# Altium PCB 2017_CHECK UP LED.PcbDoc
Units mil, origin at the board's own origin, x right, y up, seen from the top; angles counter-clockwise.
Board outline 2716.54 x 511.81 mil, 4 copper layers (1-TOP, 2-SIGNAL, 3-GND, 4-BOT), stack 68 mil thick; 13 components, 14 nets, 34 pads, 12 vias.
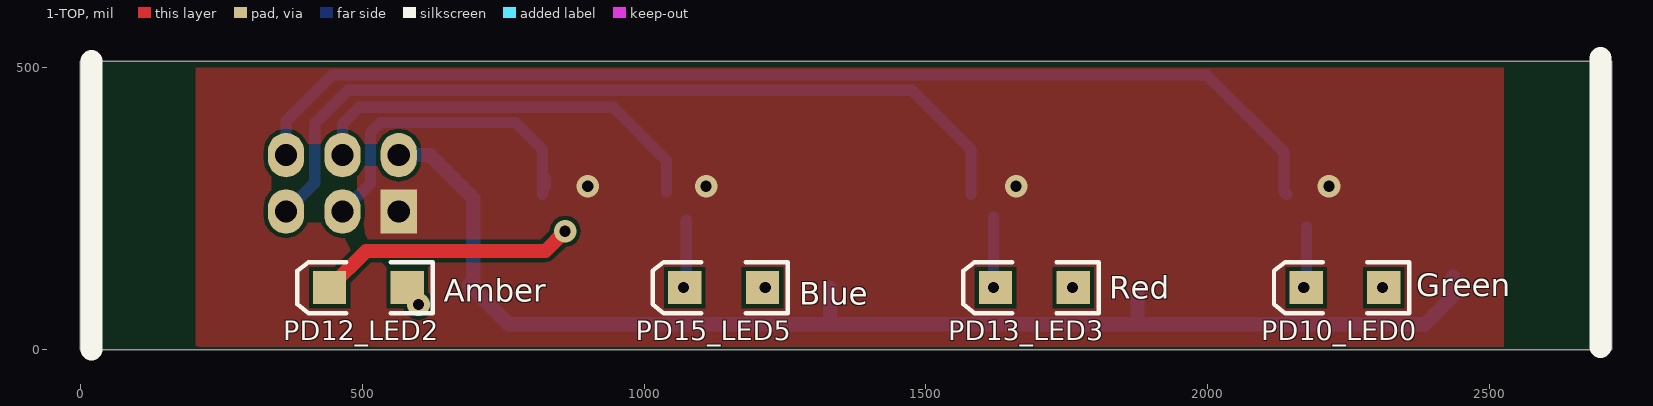
[diagram p0: 1-TOP view]
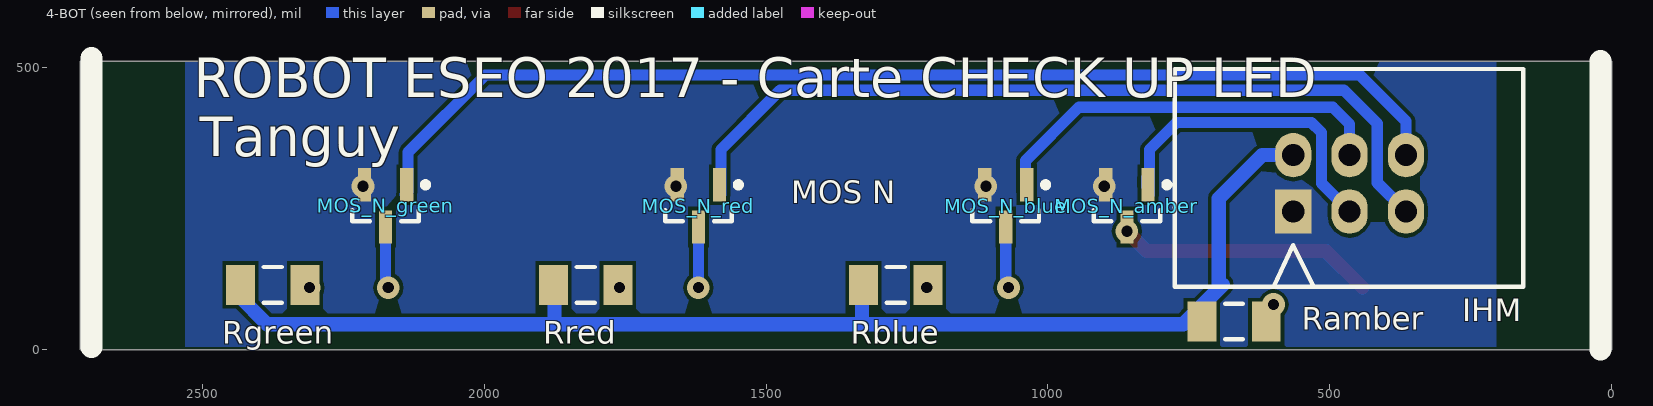
[diagram p1: 4-BOT view, seen from below]
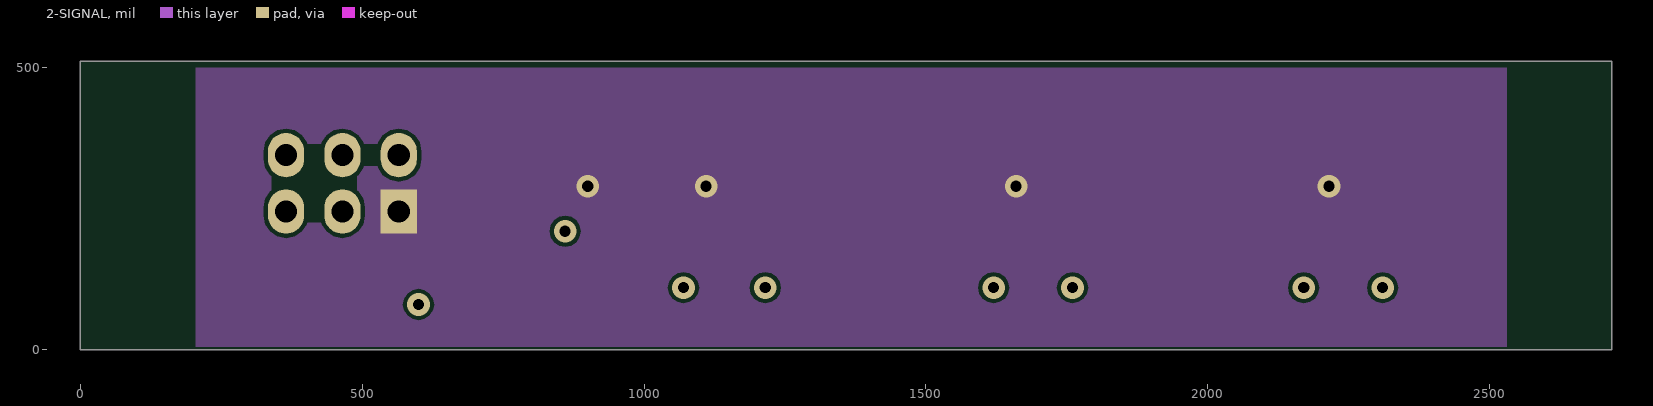
[diagram p2: 2-SIGNAL]
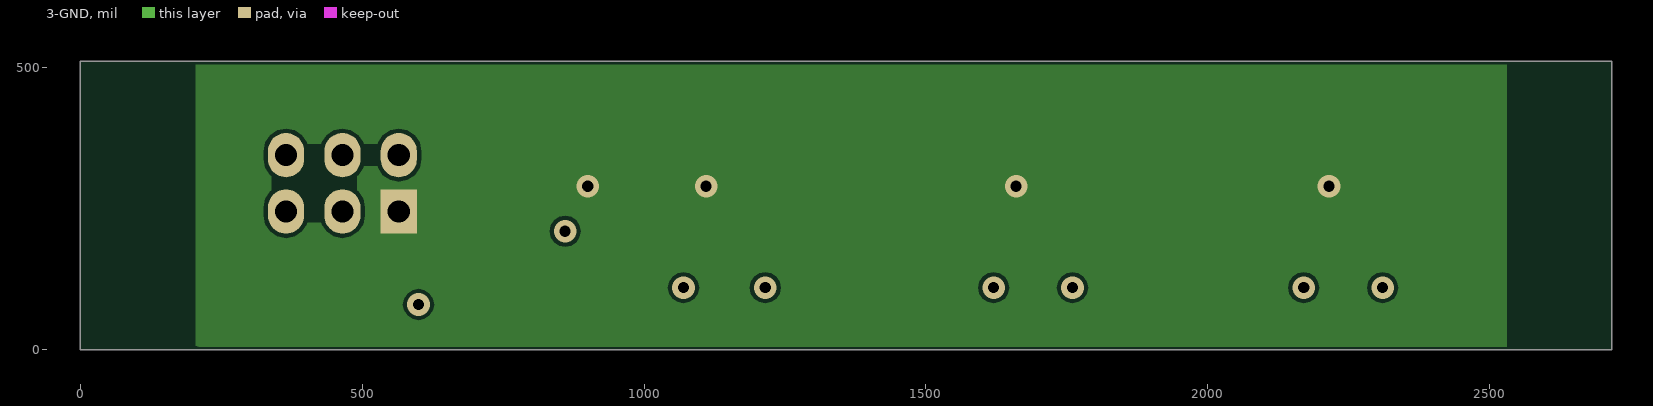
[diagram p3: 3-GND]
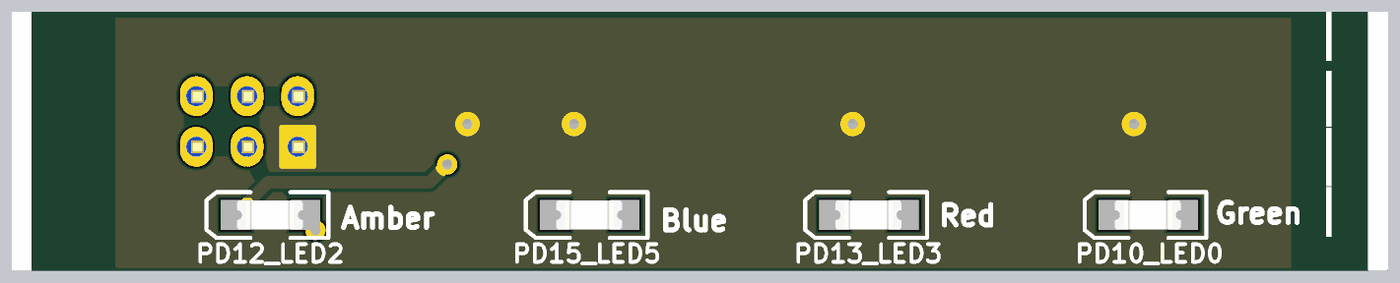
[diagram p4: 3D render of the assembled board from above, using the file's embedded part models]
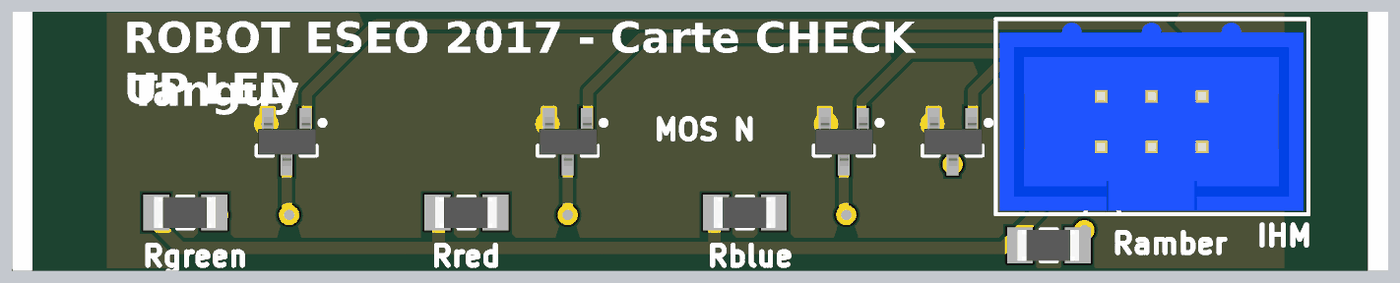
[diagram p5: 3D render of the assembled board from below, using the file's embedded part models]

## Layer stack, top to bottom
Top Solder: solder mask 0.4, Solder Resist, Dk 3.5
1-TOP: signal copper 1.4
Dielectric1: core 20.8, FR-4, Dk 4.8
2-SIGNAL: signal copper 1.4
Dielectric2: prepreg 20.8, FR-4, Dk 4.8
3-GND: signal copper 1.4
Dielectric3: core 20.8, FR-4, Dk 4.8
4-BOT: signal copper 1.4
Bottom Solder: solder mask 0.4, Solder Resist, Dk 3.5

## Board outline
0,0 0,511.81 2716.54,511.81 2716.54,0

## Design rules (kind name [scope] priority, off if disabled: settings)
Clearance Clearance_4 [InNamedPolygon('GND_TOP') Or  InNamedPolygon('3-GND') Or  InNamedPolygon('2-GND') Or  InNamedPolygon('4-GND')] p1: gap=15
Clearance Clearance_3 [InNamedPolygon('4-GND') Or  InNamedPolygon('GND_TOP') Or  InNamedPolygon('2-GND') Or  InNamedPolygon('3-GND')] p2: gap=10
Clearance Clearance_2 [InNamedPolygon('4-GND') Or  InNamedPolygon('2-GND') Or  InNamedPolygon('3-GND') Or  InNamedPolygon('1-GND') Or  InNamedPolygon('2-GND24')] p3: gap=10
Clearance Clearance_1 [InNamedPolygon('2-GND') Or  InNamedPolygon('3-GND') Or  InNamedPolygon('1-GND') Or  InNamedPolygon('4-GND')] p4: gap=10
Clearance [All] p5: gap=7
FabricationTestpoint [(IsPad And (OnTopLayer Or OnBottomLayer))] p1: side=3 testpointundercomponent=TRUE minsize=40 maxsize=100 preferedsize=60 minholesize=0 maxholesize=40 preferedholesize=32 testpointgrid=1 allowsidetop=TRUE allowsidebottom=TRUE usegrid=TRUE gridtolerance=0.01
HoleSize [All] p1: absolutevalues=TRUE maxlimit=200 minlimit=1 maxpercent=80.000 minpercent=20.000
PlaneConnect [All] p1: planeconnectstyle=Direct reliefexpansion=20 reliefentries=4 reliefconductorwidth=10 reliefairgap=10
PolygonConnect [All] p1: connectstyle=Direct reliefconductorwidth=10 reliefentries=4 polygonreliefangle="90 Angle" airgapwidth=10
RoomDefinition "2017_CHECK UP LED" [InComponentClass('2017_CHECK UP LED')] p1: confinementstyle=ConfineIn formatcopy=TRUE lockcomponents=FALSE outline 3013.39,300.67 2343.31,300.67 2343.31,976.81 3013.39,976.81
RoutingVias [All] p1: holewidth=7.87 width=7.87 viastyle="Through Hole" minholewidth=7.87 minwidth=7.87 maxholewidth=7.87 maxwidth=7.87
SilkToSolderMaskClearance SilkscreenOverComponentPads [IsPad] p1: minsilkscreentomaskgap=10 clearancetoexposedcopper=TRUE
SolderMaskExpansion [All] p1: expansion=4
Width [All] p1: maxlimit=200 minlimit=7 preferedwidth=16
25 further rules are at their usual default settings.

## Components (designator, comment, footprint, x,y, rotation, side; value= is the part's Value field where it differs from the comment)
Amber "LED" LED_1206 511.18,110 r180 top
Blue "LED" LED_1206 1141.1,110 r180 top
Green "LED" LED_1206 2243.46,110 r180 top
IHM "HE10/6_MALE_DROIT_BAS PROFIL" HE10/6_M_D_BP 565,345 r180 bottom
MOS_N_amber "Transistor MOSFET-N" SOT23-3N 860,255 r270 bottom
MOS_N_blue "Transistor MOSFET-N" SOT23-3N 1075,255 r270 bottom
MOS_N_green "Transistor MOSFET-N" SOT23-3N 2175,255 r270 bottom
MOS_N_red "Transistor MOSFET-N" SOT23-3N 1620,255 r270 bottom
Ramber "150" R1206_N 670,50 r0 bottom
Rblue "100" R1206_N 1270,115 r0 bottom
Red "LED" LED_1206 1692.28,110 r180 top
Rgreen "100" R1206_N 2375,115 r0 bottom
Rred "150" R1206_N 1820,115 r0 bottom

## Footprints (in the part's own frame and the unit in brackets; to place one, negate y for a bottom-side part, rotate by r counter-clockwise, add the part's x,y. Pads: shape width x height; smd on the part's side, far side on the other; paste and mask are expansions set on the pad)
HE10/6_M_D_BP [mm] "HE10 ; 6 CONTACTS ; MALE ;  DROIT; BAS PROFIL ; ESPACEMENTS BROCHES = 2.54 mm"
  rect 1.63x2 hole 1: 1(0,-2.54)
  oval 1.63x2 hole 1: 2(0,0) 3(2.54,-2.54) 4(2.54,0) 5(5.08,-2.54) 6(5.08,0)
  silkscreen extent -5.33,-5.94 10.36,3.88, body extent -5.13,-5.75 10.11,3.7, height 9.1
LED_1206 [mm] "SM LED; 2 Flat Leads"
  rect 1.5x1.5 smd: 1(-1.75,0) 2(1.75,0)
  silkscreen extent -2.9,-1.15 3.2,1.15, body extent -1.62,-0.72 1.68,0.73, height 1.36
R1206_N [mm] "Chip Resistor, Body 3.2x1.6mm, IPC Medium Density"
  rect 1.3x1.8 smd: 1(-1.45,0) 2(1.45,0)
  silkscreen extent -0.4,-0.8 0.4,0.8, body extent -1.68,-0.87 1.68,0.87, height 0.71
SOT23-3N [mm] "SOT23, 3-Leads, Body 2.9x1.3mm, Pitch 0.95mm, Lead Span 2.5mm, IPC Medium Density"
  rect 1.5x0.6 smd: 1(-0.95,0.95) 2(-0.95,-0.95) 3(0.95,0)
  silkscreen extent -1.07,-1.5 0.7,1.92, body extent -1.24,-1.5 1.23,1.5, height 1.1

## Part data
Amber Blue Green Red: "Typical LED"
IHM: "EMBASE HE10/6 MALE DROIT BAS PROFIL"
MOS_N_amber MOS_N_blue MOS_N_green MOS_N_red: "N-Channel MOSFET"
Ramber Rblue Rgreen Rred: library part Resistor, "Resistor"

## Via types
v1: diameter 40, hole 20, 1-TOP to 4-BOT, 12 vias

## Nets (pads, with @x,y where several pads share a name; then routed paths per layer and width w, separated by ;. In a path a pad name is that pad's centre, name@x,y a point inside that pad or via, vN(x,y) a via of type N, cw(c..) or ccw(c..) an arc to the next point about the centre after c; other vN are vias at no path point)
5V: IHM.2 Ramber.2 Rblue.2 Rgreen.2 Rred.2 | length 2276.6
  4-BOT w25: IHM.2@560,345 IHM.2 620,345 697.09,267.91 697.09,115 ; 690,115 760,45 1330,45 ; Rblue.2@1330,110 1330,45 ; Rred.2@1875,105 1875,45 ; Rgreen.2@2435,130 2435,95 2385,45 1875,45 ; 1330,45 1875,45
GND: IHM.1 MOS_N_amber.2 MOS_N_blue.2 MOS_N_green.2 MOS_N_red.2
  other v1: 900,290 1110,290 1660,290 2215,290
NetAmber_1: Amber.1 Ramber.1
  other v1: 600,80
NetAmber_2: Amber.2 MOS_N_amber.3 | length 459.1
  1-TOP w25: Amber.2 507.28,175 825,175 v1(860,210)
NetBlue_1: Blue.1 Rblue.1
  other v1: 1215,110
NetBlue_2: Blue.2 MOS_N_blue.3 | length 122.1
  4-BOT w20: v1(1070,110) 1075,115 MOS_N_blue.3@1075,230
NetGreen_1: Green.1 Rgreen.1
  other v1: 2310,110
NetGreen_2: Green.2 MOS_N_green.3 | length 114.7
  4-BOT w20: v1@2170,105 2175,110 MOS_N_green.3
  other v1: 2170,110
NetMOS_N_red_3: MOS_N_red.3 Red.2 | length 125
  4-BOT w20: v1(1620,110) MOS_N_red.3@1620,235
NetRed_1: Red.1 Rred.1
  other v1: 1760,110
PD10_LED0: IHM.6 MOS_N_green.1 | length 1997.8
  4-BOT w20: IHM.6 365,405 447,487 1998,487 2135,350 2135,280 MOS_N_green.1@2140,275
PD12_LED2: IHM.3 MOS_N_amber.1 | length 598
  4-BOT w20: IHM.3@465,235 IHM.3 515,295 515,385 533,403 772,403 820,355 MOS_N_amber.1@820,275 ; MOS_N_amber.1@825,290 MOS_N_amber.1@825,305
PD13_LED3: IHM.5 MOS_N_red.1 | length 1489.1
  4-BOT w20: IHM.5 415.91,295.91 415.91,400.91 475,460 1475,460 1580,355 MOS_N_red.1@1580,275
PD15_LED5: IHM.4 MOS_N_blue.1 | length 736.8
  4-BOT w20: IHM.4 465,400 495,430 945,430 1040,335 MOS_N_blue.1@1040,280

## Polygon pours and split planes (outlines as drawn)
GND on 1-TOP "GND" (solid, pour order 12): 205,500 205,0 210,5 2525,5 2525,500
GND on 2-SIGNAL "GND" (solid, pour order 10): 205,500 205,5 2530,5 2530,500
GND on 3-GND "GND" (solid, pour order 8): 205,505 205,0 210,5 2530,5 2530,505
GND on 4-BOT "GND" (solid, pour order 6): 205,510 2530,510 2530,5 205,5

## Silkscreen, mask and mechanical layers (free items; w line width, h text height)
Top Overlay:
  lines w39.37: 20,0 20,511.81 ; 2696.54,5 2696.54,516.81
  text "|                                                                                               |" at 2635,410 h140
  text "|                                                                                               |" at 2635,280 h140
  text "|                                                                                               |" at 2635,180 h140
  text "PD12_LED2" at 360,17 h35
  text "PD15_LED5" at 985,17 h35
  text "PD13_LED3" at 1540,17 h35
  text "PD10_LED0" at 2095,17 h35
Bottom Overlay:
  lines w39.37: 20,0 20,511.81 ; 2696.54,5 2696.54,516.81
  text "ROBOT ESEO 2017 - Carte CHECK UP LED" at 2515,425 h120
  text "Tanguy" at 2505,320 h120
  text "MOS N" at 1455,260 h40
Mechanical 1:
  the board outline again, w20